# Altium PCB PWR_MOSFET_v2.PcbDoc
Units mm, origin at the board's own origin, x right, y up, seen from the top; angles counter-clockwise.
Board outline 90 x 91.65 mm, 2 copper layers (Top Layer, Bottom Layer); 105 components, 60 nets, 273 pads, 68 vias.
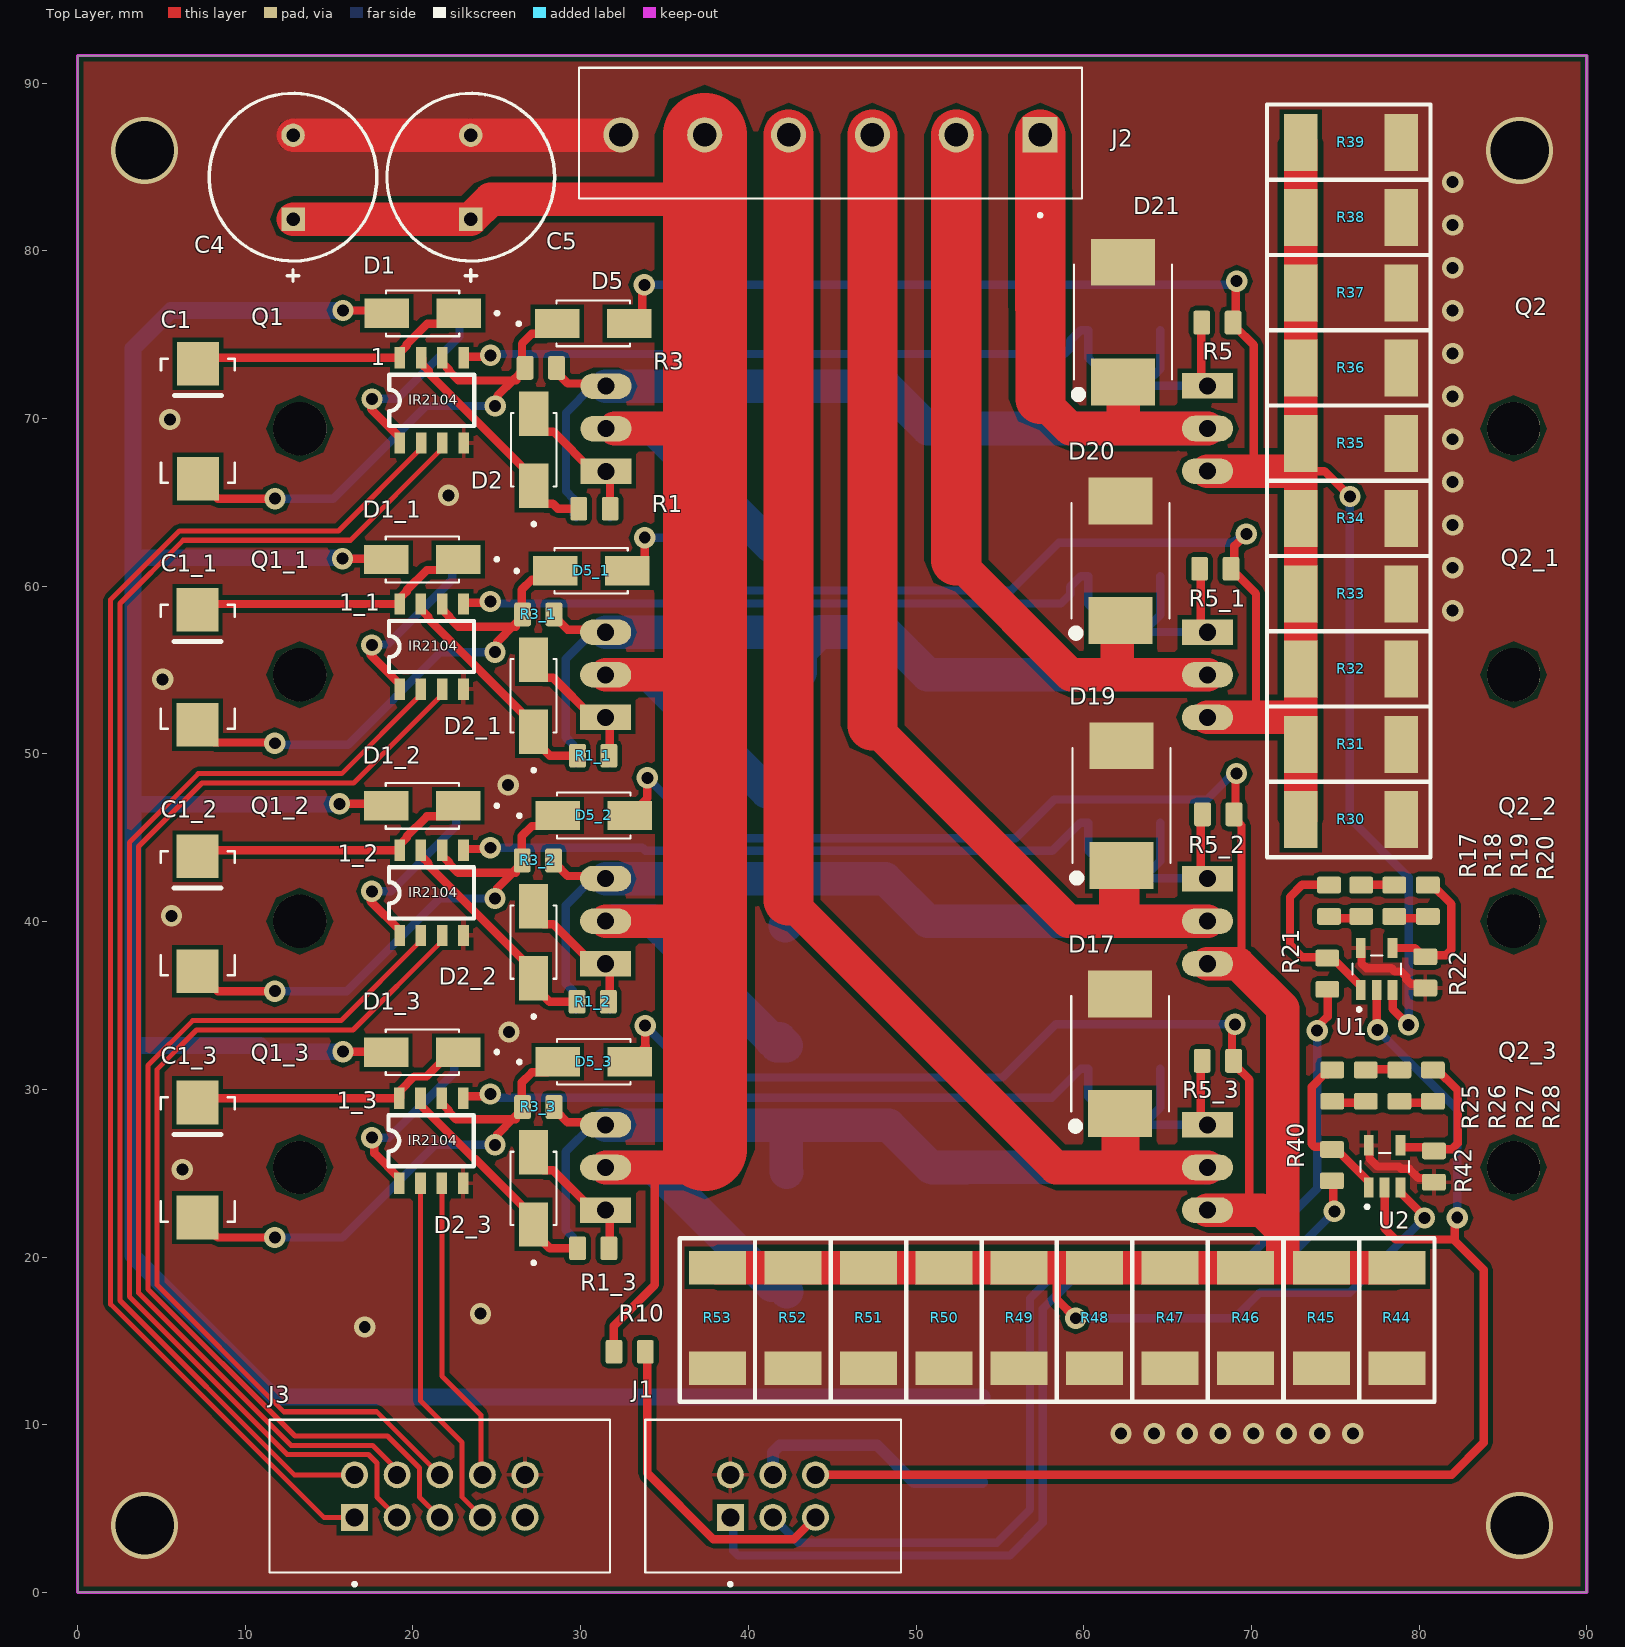
[diagram p0: Top Layer view]
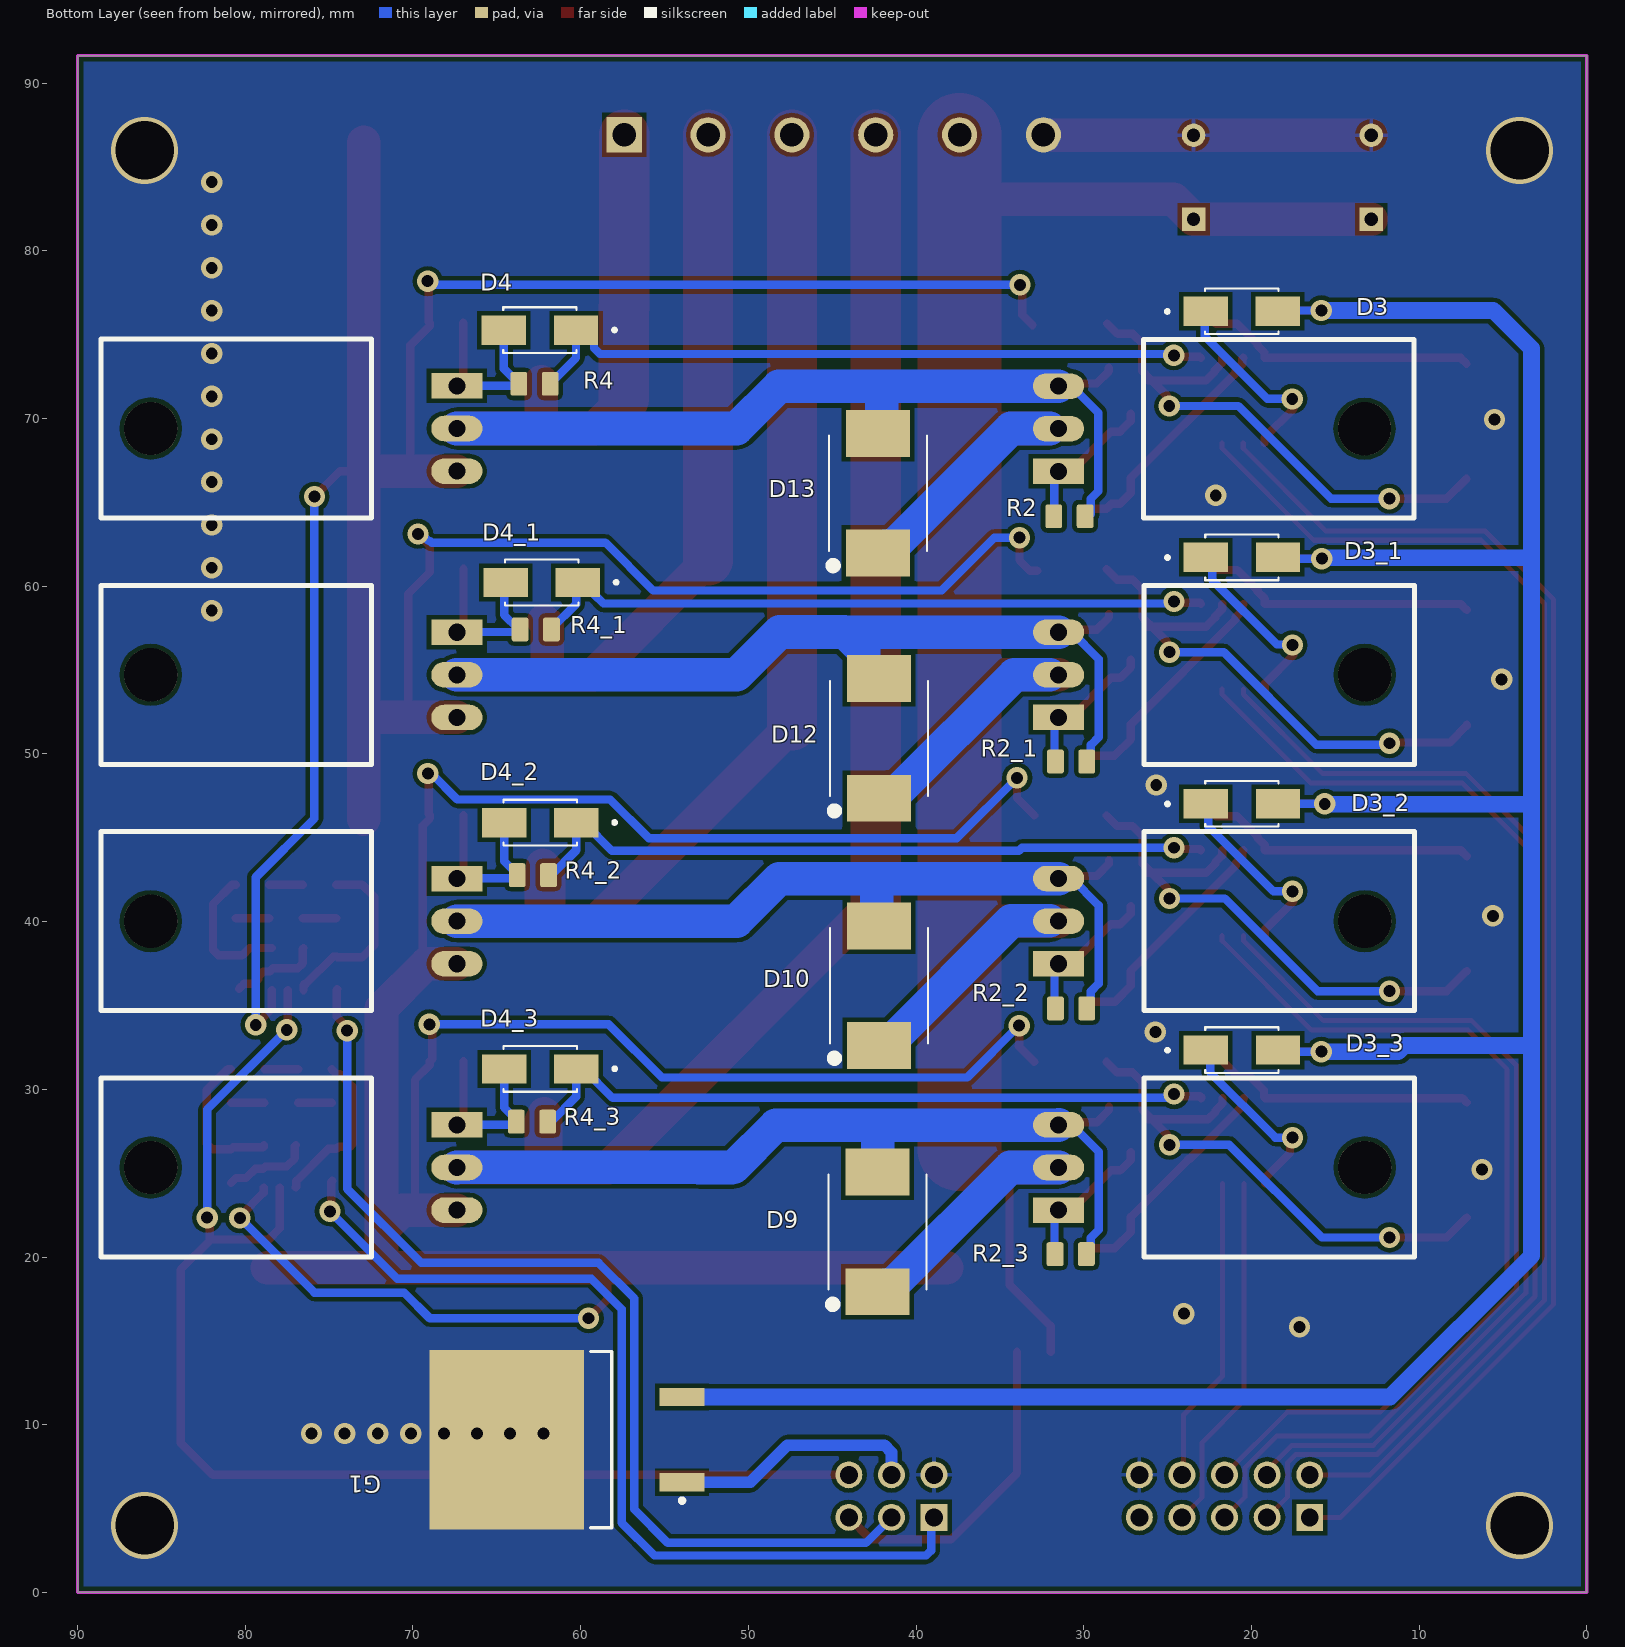
[diagram p1: Bottom Layer view, seen from below]
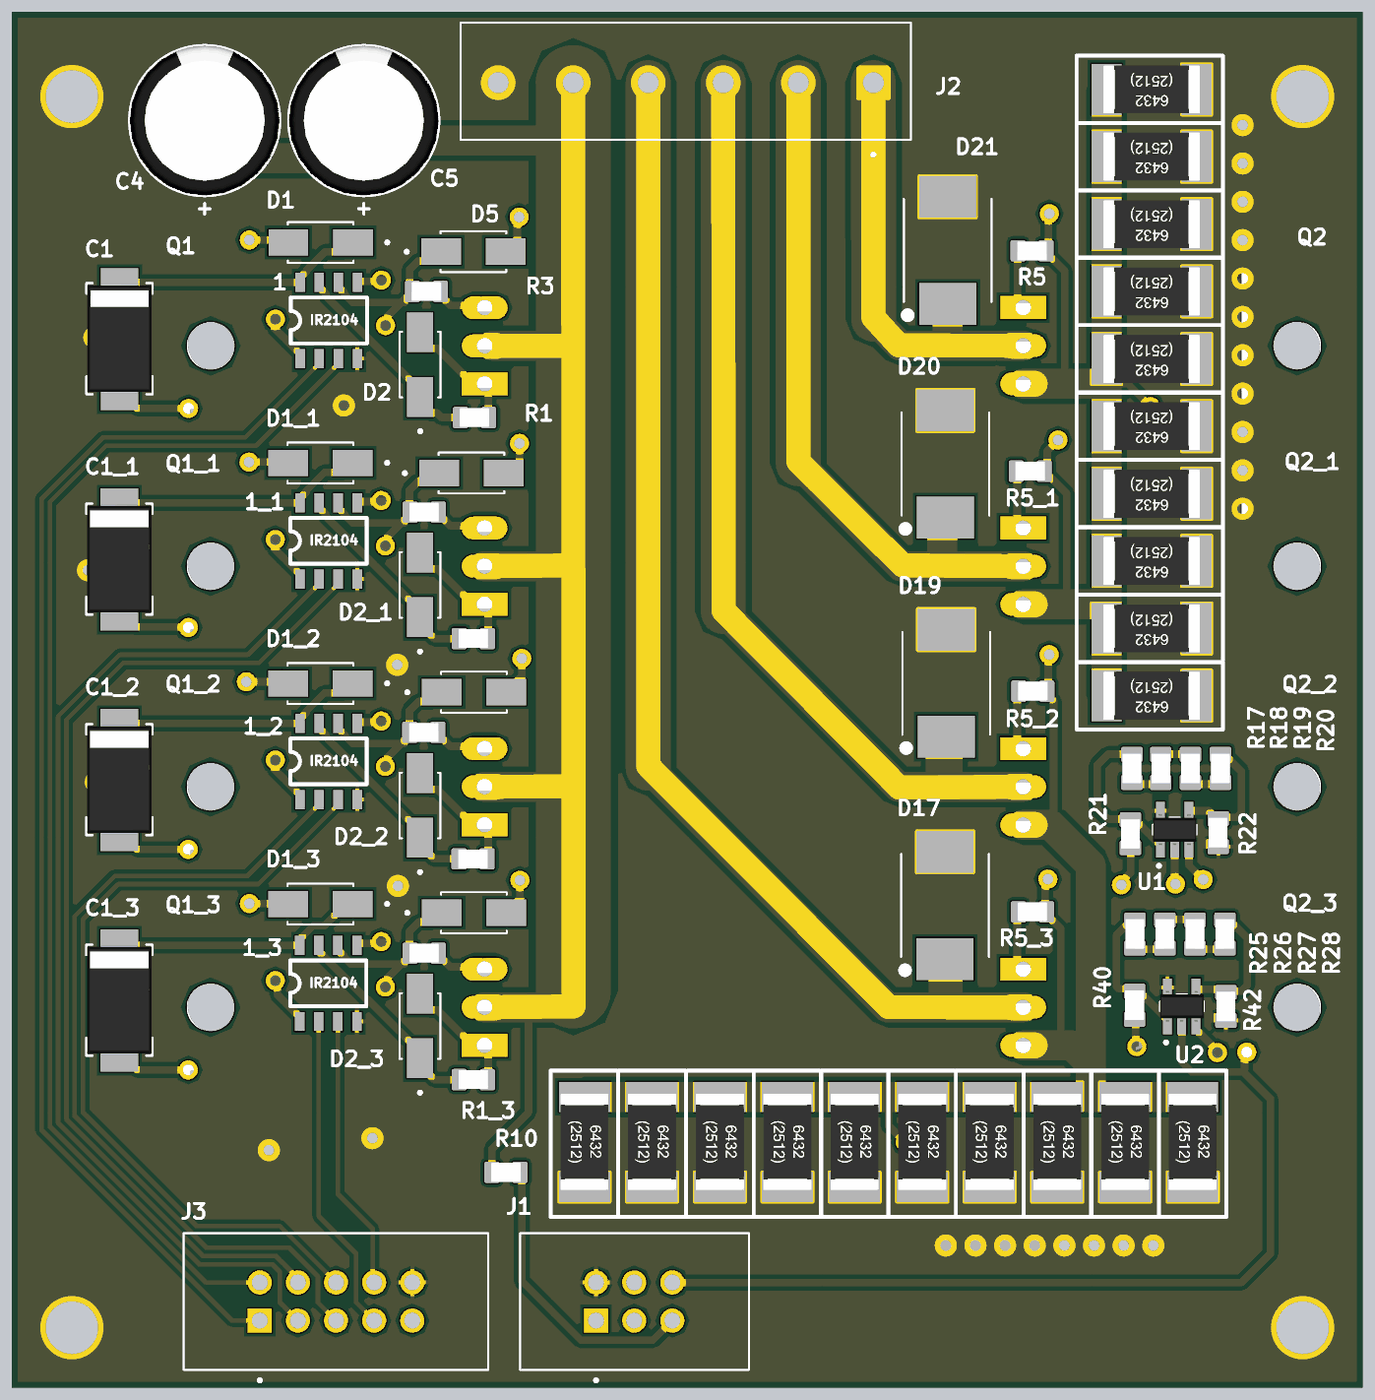
[diagram p2: 3D render of the assembled board from above, using the file's embedded part models]

## Layer stack, top to bottom
Top Solder: solder mask 0.0102, Solder Resist, Dk 3.5
Top Layer: signal copper 0.0356
Dielectric 1: dielectric 0.32, FR-4, Dk 4.8
Bottom Layer: signal copper 0.0356
Bottom Solder: solder mask 0.0102, Solder Resist, Dk 3.5

## Board outline
0,0 0,91.65 90,91.65 90,0

## Design rules (kind name [scope] priority, off if disabled: settings)
Clearance [All] p1: gap=0.254 ignorepadtopadclearanceinfootprint=FALSE except(0: Arc-Hole Track-Hole SMDPad-Hole THPad-Hole Via-Hole Fill-Hole Poly-Hole Region-Hole Text-Hole)
HoleSize [All] p1: absolutevalues=TRUE maxlimit=4 minlimit=0.025 maxpercent=80.000 minpercent=20.000
PolygonConnect [All] p1: connectstyle=Relief reliefconductorwidth=0.254 reliefentries=4 polygonreliefangle="90 Angle" airgapwidth=0.254
RoutingVias [All] p1: holewidth=0.711 width=1.27 viastyle="Through Hole" minholewidth=0 minwidth=0 maxholewidth=6 maxwidth=7
SolderMaskExpansion [All] p1: expansion=0.102 istentingtop=FALSE
Width [All] p1: maxlimit=6 minlimit=0.254 preferedwidth=0.254
29 further rules are at their usual default settings.

## Components (designator, comment, footprint, x,y, rotation, side; value= is the part's Value field where it differs from the comment)
1 "IR2104S" IR2104S 23.025,68.545 r90 top
1_1 "IR2104S" IR2104S 23.013,53.867 r90 top
1_2 "IR2104S" IR2104S 23.013,39.178 r90 top
1_3 "IR2104S" IR2104S 22.99,24.395 r90 top
C1 "{Value}" "C - EL_Tantal_TYPED" 7.175,69.875 r270 top
C1_1 "{Value}" "C - EL_Tantal_TYPED" 7.163,55.197 r270 top
C1_2 "{Value}" "C - EL_Tantal_TYPED" 7.163,40.508 r270 top
C1_3 "{Value}" "C - EL_Tantal_TYPED" 7.163,25.818 r270 top
C4 "220uF 50v" "ECR 10x13mm" 12.85,84.4 r90 top value=220uF
C5 "220uF 50v" "ECR 10x13mm" 23.45,84.4 r90 top value=220uF
D1 "ES1J" DIO_ES1J 20.575,76.275 r180 top
D1_1 "ES1J" DIO_ES1J 20.563,61.597 r180 top
D1_2 "ES1J" DIO_ES1J 20.563,46.908 r180 top
D1_3 "ES1J" DIO_ES1J 20.563,32.218 r180 top
D2 "ES1J" DIO_ES1J 27.2,68.15 r90 top
D2_1 "ES1J" DIO_ES1J 27.188,53.472 r90 top
D2_2 "ES1J" DIO_ES1J 27.188,38.783 r90 top
D2_3 "ES1J" DIO_ES1J 27.188,24.093 r90 top
D3 "ES1J" DIO_ES1J 20.575,76.4 r180 bottom
D3_1 "ES1J" DIO_ES1J 20.563,61.722 r180 bottom
D3_2 "ES1J" DIO_ES1J 20.563,47.033 r180 bottom
D3_3 "ES1J" DIO_ES1J 20.563,32.343 r180 bottom
D4 "ES1J" DIO_ES1J 62.425,75.275 r0 bottom
D4_1 "ES1J" DIO_ES1J 62.325,60.225 r0 bottom
D4_2 "ES1J" DIO_ES1J 62.413,45.908 r0 bottom
D4_3 "ES1J" DIO_ES1J 62.413,31.218 r0 bottom
D5 "ES1J" DIO_ES1J 30.75,75.675 r0 top
D5_1 "ES1J" DIO_ES1J 30.625,60.925 r0 top
D5_2 "ES1J" DIO_ES1J 30.788,46.333 r0 top
D5_3 "ES1J" DIO_ES1J 30.788,31.643 r0 top
D9 "MBRS540T3G" DIOM7958X213N 42.3,21.5 r90 bottom
D10 "MBRS540T3G" DIOM7958X213N 42.2,36.175 r90 bottom
D12 "MBRS540T3G" DIOM7958X213N 42.2,50.925 r90 bottom
D13 "MBRS540T3G" DIOM7958X213N 42.275,65.55 r90 bottom
D17 "MBRS540T3G" DIOM7958X213N 62.175,32.125 r90 top
D19 "MBRS540T3G" DIOM7958X213N 62.25,46.925 r90 top
D20 "MBRS540T3G" DIOM7958X213N 62.2,61.525 r90 top
D21 "MBRS540T3G" DIOM7958X213N 62.35,75.757 r90 top
G1 "L7812C - V" D2PAK_M 60.8,9.115 r0 bottom
J1 "DS1013-06SSIB1" CONNFLY_DS1013-06SSIB1 41.465,5.775 r0 top
J2 "TB003-500-P06BE" CUI_TB003-500-P06BE 57.4,86.925 r180 top
J3 "DS1013-10SSIB1" CONNFLY_DS1013-10SSIB1 21.6,5.745 r0 top
Q1 "IRF" TO-220-KCS0003B 31.506,69.398 r90 top locked
Q1_1 "IRF" TO-220-KCS0003B 31.494,54.72 r90 top locked
Q1_2 "IRF" TO-220-KCS0003B 31.494,40.031 r90 top locked
Q1_3 "IRF" TO-220-KCS0003B 31.494,25.341 r90 top locked
Q2 "IRF" TO-220-KCS0003B 67.384,69.41 r270 top
Q2_1 "IRF" TO-220-KCS0003B 67.384,54.72 r270 top
Q2_2 "IRF" TO-220-KCS0003B 67.384,40.031 r270 top locked
Q2_3 "IRF" TO-220-KCS0003B 67.384,25.341 r270 top locked
R1 "10R" RESC2012X65N 30.825,64.625 r0 top
R1_1 "10R" RESC2012X65N 30.75,49.9 r0 top
R1_2 "10R" RESC2012X65N 30.725,35.225 r0 top
R1_3 "10R" RESC2012X65N 30.75,20.525 r0 top
R2 "10K" RESC2012X65N 30.85,64.175 r180 bottom
R2_1 "10K" RESC2012X65N 30.75,49.55 r180 bottom
R2_2 "10K" RESC2012X65N 30.75,34.825 r180 bottom
R2_3 "10K" RESC2012X65N 30.775,20.175 r180 bottom
R3 "10R" RESC2012X65N 27.625,73.025 r0 top
R3_1 "10R" RESC2012X65N 27.475,58.325 r0 top
R3_2 "10R" RESC2012X65N 27.45,43.65 r0 top
R3_3 "10R" RESC2012X65N 27.475,28.95 r0 top
R4 "10R" RESC2012X65N 62.75,72.075 r0 bottom
R4_1 "10R" RESC2012X65N 62.675,57.425 r0 bottom
R4_2 "10R" RESC2012X65N 62.85,42.775 r0 bottom
R4_3 "10R" RESC2012X65N 62.9,28.075 r0 bottom
R5 "10K" RESC2012X65N 67.975,75.725 r0 top
R5_1 "10K" RESC2012X65N 67.85,61.05 r0 top
R5_2 "10K" RESC2012X65N 68.025,46.4 r0 top
R5_3 "10K" RESC2012X65N 68,31.7 r0 top
R10 "20K" RESC2012X65N 32.925,14.35 r0 top
R17 "10K" RESC2012X65N 74.625,41.25 r90 top
R18 "10K" RESC2012X65N 76.55,41.25 r270 top
R19 "10K" RESC2012X65N 78.525,41.25 r90 top
R20 "10K" RESC2012X65N 80.525,41.25 r270 top
R21 "10K" RESC2012X65N 74.525,36.9 r90 top
R22 "10K" RESC2012X65N 80.375,36.975 r90 top
R25 "10K" RESC2012X65N 74.825,30.225 r90 top
R26 "10K" RESC2012X65N 76.825,30.225 r270 top
R27 "10K" RESC2012X65N 78.825,30.225 r90 top
R28 "10K" RESC2012X65N 80.825,30.225 r270 top
R30 "1R" R2512 75.936,46.095 r180 top
R31 "1R" R2512 75.936,50.575 r180 top
R32 "1R" R2512 75.936,55.075 r180 top
R33 "1R" R2512 75.936,59.55 r180 top
R34 "1R" R2512 75.936,64.05 r180 top
R35 "1R" R2512 75.936,68.525 r180 top
R36 "1R" R2512 75.936,73.025 r180 top
R37 "1R" R2512 75.936,77.5 r180 top
R38 "1R" R2512 75.936,82 r180 top
R39 "1R" R2512 75.936,86.475 r180 top
R40 "10K" RESC2012X65N 74.805,25.483 r90 top
R42 "10K" RESC2012X65N 80.889,25.396 r90 top
R44 "1R" R2512 78.675,16.375 r270 top
R45 "1R" R2512 74.175,16.375 r270 top
R46 "1R" R2512 69.65,16.375 r270 top
R47 "1R" R2512 65.15,16.375 r270 top
R48 "1R" R2512 60.65,16.375 r270 top
R49 "1R" R2512 56.15,16.375 r270 top
R50 "1R" R2512 51.675,16.375 r270 top
R51 "1R" R2512 47.175,16.375 r270 top
R52 "1R" R2512 42.65,16.375 r270 top
R53 "1R" R2512 38.153,16.375 r270 top
U1 "LMC7101BIM5" *SOT95P280X145-5N 77.475,37.175 r90 top
U2 "LMC7101BIM5" *SOT95P280X145-5N 77.95,25.405 r90 top

## Footprints (in the part's own frame and the unit in brackets; to place one, negate y for a bottom-side part, rotate by r counter-clockwise, add the part's x,y. Pads: shape width x height; smd on the part's side, far side on the other; paste and mask are expansions set on the pad)
*SOT95P280X145-5N [mm]
  rect 1.21x0.59 smd mask+0.102: 1(-1.255,0.95) 2(-1.255,0) 3(-1.255,-0.95)
  rect 1.21x0.59 smd: 4(1.255,-0.95) 5(1.255,0.95)
  silkscreen extent -2.51,-1.45 0.8,1.45, body extent -1.18,-1.45 1.2,1.45, height 1.1
"C - EL_Tantal_TYPED" [mm] "танталовый конденсатор"
  rect 2.6x2.5 smd: 1(-3.4,0) 2(3.46,0)
  silkscreen extent -3.7,-2.2 3.7,2.2, body extent -3.65,-2.15 3.65,2.15, height 3.1
CONNFLY_DS1013-06SSIB1 [mm]
  rect 1.605x1.605 hole 1.07: 1(-2.54,-1.3)
  round 1.605 hole 1.07: 2(-2.54,1.24) 3(0,-1.3) 4(0,1.24) 5(2.54,-1.3) 6(2.54,1.24)
  silkscreen extent -7.61,-5.38 7.64,4.52
CONNFLY_DS1013-10SSIB1 [mm]
  rect 1.605x1.605 hole 1.07: 1(-5.08,-1.27)
  round 1.605 hole 1.07: 2(-5.08,1.27) 3(-2.54,-1.27) 4(-2.54,1.27) 5(0,-1.27) 6(0,1.27) 7(2.54,-1.27) 8(2.54,1.27) 9(5.08,-1.27) 10(5.08,1.27)
  silkscreen extent -10.15,-5.35 10.15,4.55
CUI_TB003-500-P06BE [mm]
  rect 2.1x2.1 hole 1.4: 1(0,0)
  round 2.1 hole 1.4: 2(5,0) 3(10,0) 4(15,0) 5(20,0) 6(25,0)
  silkscreen extent -2.5,-4 27.5,4.9
D2PAK_M [mm] "D2-PAK, 4-Leads, Body 8.8x10.4mm, Pitch 2.54mm, Lead Span 15.1mm, IPC Low Density"
  rect 2.7x1.1 smd: 1(-6.85,2.54) 3(-6.85,-2.54)
  rect 9.2x10.7 smd: 2(3.6,0)
  silkscreen extent -6.97,-5.25 -1.4,5.25, body extent -2.65,-5.28 6.35,5.28, height 4.69
DIO_ES1J [mm]
  rect 2.65x1.75 smd: A(2.15,0) K(-2.15,0)
  silkscreen extent -4.54,-1.36 2.19,1.36
DIOM7958X213N [mil]
  rect 110x150 smd: A(140.49,0) C(-140.49,0)
  silkscreen extent -176,-115 135,115
"ECR 10x13mm" [mm] "Rad Capacitor 50В-220мкФ"
  rect 1.4x1.4 hole 0.8 mask+0.06: 1(-2.5,0)
  round 1.4 hole 0.8 mask+0.06: 2(2.5,0)
  silkscreen extent -6.22,-5 5,5, body extent -5,-5 4.97,5, height 12.51
IR2104S [mm]
  rect 1.27x0.635 smd: 1(0,3.81) 2(0,2.54) 3(0,1.27) 4(0,0) 5(5.08,0) 6(5.08,1.27) 7(5.08,2.54) 8(5.08,3.81)
  silkscreen extent 1.02,-0.63 4.06,4.44
R2512 [mm]
  rect 2x3.4 smd: 1(-3,0) 2(3,0)
  silkscreen extent -4.75,-2.25 5,2.25, body extent -3.2,-1.6 3.2,1.6, height 0.6
RESC2012X65N [mm]
  rrect25% 1x1.42 smd: 1(-0.935,0) 2(0.935,0)
  body extent -1,-0.63 1,0.63, height 0.6
TO-220-KCS0003B [mil]
  rect 60x120 hole 40: 1(-100,0)
  oval 60x120 hole 40: 2(0,0) 3(100,0)
  round 125 hole 125 unplated: ""(0,718.5)
  body extent -190,-97 200,827

## Part data
1 1_1 1_2 1_3: "Half-Bridge Gate Driver IC Non-Inverting 8-SOIC", Package="SO-8 Infineon", Availability=Unavailable, MF="Infineon Technologies", MP=IR2104S, Price=None, SnapEDA_Link=https://www.snapeda.com/parts/IR2104S/Infineon%20Technologies/view-part/582439/?ref=snap
C1 C1_1 C1_2 C1_3: library part "C - EL_Tantal_SMD_TypeD", "Конденсатор электролитический танталовый TypeD", Indication={Indication}, Name="22uf 35V"
C4 C5: library part "Cap Pol", "Polarized Capacitor (Rad)", Voltage=50, Type=Type, URL=http://www.hitano.com.tw/PDF/ECR_081225.pdf
D1 D1_1 D1_2 D1_3 D2 D2_1 D2_2 D2_3 D3 D3_1 D3_2 D3_3 D4 D4_1 D4_2 D4_3 D5 D5_1 D5_2 D5_3: "Diode Standard 600V 1A Surface Mount SMA (DO-214AC)", Package="SMA-2 ON Semiconductor", Arrow_Electronics-Purchase-URL=https://snapeda.com/shop?store=Arrow+Electronics&id=1637442, Availability=Good, BuyPart=https://www.snapeda.com/parts/ES1J/ON%20Semiconductor/view-part/1637442/?ref=eda, DigiKey-Purchase-URL=https://snapeda.com/shop?store=DigiKey&id=1637442, MF="ON Semiconductor", Mouser-Purchase-URL=https://snapeda.com/shop?store=Mouser&id=1637442, MP=ES1J, Price=None, SnapEDA_Link=https://www.snapeda.com/parts/ES1J/ON%20Semiconductor/view-part/1637442/?ref=snap
D9 D10 D12 D13 D17 D19 D20 D21: "Diode Schottky 40V 5A Surface Mount SMC", Package="DO-214 ON Semiconductor", Availability=Unavailable, MF="ON Semiconductor", MP=MBRS540T3G, Price=None, SnapEDA_Link=https://www.snapeda.com/parts/MBRS540T3G/ON%20Semiconductor/view-part/78777/?ref=snap
G1: library part "G - L7812", "Линейный стабилизатор 12В 0,5А", Indication={Indication}, Name=L7812
J1: "Socket; IDC; male; PIN: 6; straight; THT; gold plated; 2.54mm"
J2: "2~24 Poles, Screw Type, Horizontal, 5.0 Pitch, 26~14 _AWG_, Terminal Block Connector", Package=None, Availability=Unavailable, MF="CUI Devices", MP=TB003-500-P06BE, Price=None, SnapEDA_Link=https://www.snapeda.com/parts/TB003-500-P06BE/CUI%20Devices/view-part/3590657/?ref=snap
J3: "Socket; IDC; male; PIN: 10; straight; THT; gold plated; 2.54mm", Package=None, Availability=Unavailable, BuyPart=https://www.snapeda.com/parts/DS1013-10SSIB1/Connfly/view-part/951223/?ref=eda, MF=Connfly, MP=DS1013-10SSIB1, Price=None, SnapEDA_Link=https://www.snapeda.com/parts/DS1013-10SSIB1/Connfly/view-part/951223/?ref=snap
Q1 Q1_1 Q1_2 Q1_3 Q2 Q2_1 Q2_2 Q2_3: "N-Channel Power Transistor - TO-220", Package=None, Availability=Unavailable, MP=IPP037N06L3_G, Price=None
R1 R1_1 R1_2 R1_3 R2 R2_1 R2_2 R2_3 R3 R3_1 R3_2 R3_3 R4 R4_1 R4_2 R4_3 R5 R5_1 R5_2 R5_3 R10: library part Resistor
R17 R18 R19 R20 R21 R22 R25 R26 R27 R28 R40 R42: library part 8-1879343-8, "Res Thin Film 0805 10K Ohm 1% 0.1W(1/10W) Â±50ppm/C Epoxy Pad SMD T/R", Package=0805, Power_Rating=".1 W", Tolerance=1%, Voltage_Rating="100 V", Availability=Warning, Check_prices=https://www.snapeda.com/parts/8-1879343-8/TE%20Connectivity/view-part/2208734/?ref=eda, EU_RoHS_Compliance=Compliant, MF="TE Connectivity", MP=8-1879343-8, Price=None, Resistance=10K, SnapEDA_Link=https://www.snapeda.com/parts/8-1879343-8/TE%20Connectivity/view-part/2208734/?ref=snap
R30 R31 R32 R33 R34 R35 R36 R37 R38 R39 R44 R45 R46 R47 R48 R49 R50 R51 R52 R53: library part "Resistor - 1%", "Resistor - 1%"
U1 U2: Check_prices=https://www.snapeda.com/parts/LMC7101BIM5/Texas%20Instruments/view-part/19255/?ref=eda, SnapEDA_Link=https://www.snapeda.com/parts/LMC7101BIM5/Texas%20Instruments/view-part/19255/?ref=snap

## Via types
v1: diameter 1.27, hole 0.711, Top Layer to Bottom Layer, 64 vias
v2: diameter 4, hole 3.5, Top Layer to Bottom Layer, 4 vias

## Nets (pads, with @x,y where several pads share a name; then routed paths per layer and width w, separated by ;. In a path a pad name is that pad's centre, name@x,y a point inside that pad or via, vN(x,y) a via of type N, cw(c..) or ccw(c..) an arc to the next point about the centre after c; other vN are vias at no path point)
12v: D1.A D1_1.A D1_2.A D1_3.A D3.A D3_1.A D3_2.A D3_3.A G1.3 | length 180.8
  Top Layer w0.5: v1(15.625,47.025) 18.296,47.025 D1_2.A ; v1(15.8,61.65) 18.266,61.65 18.313,61.697 D1_1.A ; v1(15.825,32.25) 18.245,32.25 18.313,32.318 D1_3.A ; v1(15.825,76.45) 18.25,76.45 D1.A
  Bottom Layer w0.5: v1(15.625,47.025) 18.371,47.025 18.388,47.008 D3_2.A ; v1(15.8,61.65) 18.341,61.65 D3_1.A ; v1(15.825,32.25) 18.32,32.25 D3_3.A ; v1(15.825,76.45) 18.325,76.45 18.4,76.375 D3.A
  Bottom Layer w1: v1(15.625,47.025) 15.6,47 3.3,47 ; v1(15.8,61.65) 15.75,61.7 3.3,61.7 ; v1(15.825,32.25) 11.24,32.25 10.879,32.611 3.3,32.611 ; v1(15.825,76.45) 5.575,76.45 3.3,74.175 3.3,61.7 ; G1.3 11.72,11.655 3.3,20.075 3.3,32.611 ; 3.3,32.611 3.3,47 ; 3.3,47 3.3,61.7
A: 1.2 J3.1 | length 84.4
  Top Layer w0.3: J3.1 14.683,4.475 1.975,17.183 1.975,57.325 1.975,58.083 1.975,59.208 6.067,63.3 7.192,63.3 7.95,63.3 15.557,63.3 20.485,68.228 1.2
A3.3v: J1.6 U1.2 U2.2 | length 77.3
  Top Layer w0.5: J1.6 81.94,7.015 83.85,8.925 83.85,19.25 82.05,21.05 ; U1.2 77.475,33.6 v1(77.525,33.55) ; U2.2 77.95,21.7 78.6,21.05 82.05,21.05 ; v1(82.275,22.35) 82.128,22.203 82.128,21.128 82.05,21.05
  Bottom Layer w0.5: v1(77.525,33.55) 82.275,28.8 v1(82.275,22.35)
AGND: 1.4 1_1.4 1_2.4 1_3.4 C4.2 C5.2 D17.A D19.A D20.A D21.A G1.2 J1.2 J2.6 J3.10 R22.1 R30.1 R31.1 R32.1 R33.1 R34.1 R35.1 R36.1 R37.1 R38.1 R39.1 R42.1 R44.2 R45.2 R46.2 R47.2 R48.2 R49.2 R50.2 R51.2 R52.2 R53.2 U1.5 U2.5 | length 30.2
  Top Layer w0.5: U1.5 76.57,38.385 76.57,37.518 76.863,37.225 78.346,37.225 78.542,37.029 78.929,37.029 79.224,36.734 79.224,36.583 79.517,36.29 80.085,36.29 R22.1@80.375,36 ; U2.5 77.045,26.615 77.045,25.883 77.528,25.4 78.8,25.4 78.941,25.259 79.404,25.259 79.952,24.711 80.564,24.711 R42.1@80.85,24.425
  Top Layer w2: C4.2 C5.2 32.375,86.9 J2.6
  other v1: 62.225,9.475 64.2,9.475 66.175,9.475 68.15,9.475 70.125,9.475 72.1,9.475 74.075,9.475 76.05,9.475 17.125,15.825 24.025,16.625 6.25,25.225 25.725,33.425 5.6,40.35 25.675,48.15 5.075,54.45 82,58.55 82,61.105 82,63.66 22.125,65.425 82,66.215 82,68.77 5.5,69.95 82,71.325 82,73.88 82,76.435 82,78.99 82,81.545 82,84.1
  other v2: 4,4 86,4 4,86 86,86
B: 1_1.2 J3.3 | length 71.1
  Top Layer w0.3: J3.3 17.853,5.681 17.853,7.722 17.354,8.221 12.503,8.221 3.083,17.642 3.083,44.716 7.192,48.825 15.748,48.825 20.473,53.55 1_1.2
C: 1_2.2 J3.5 | length 57.1
  Top Layer w0.3: 1_2.2 20.473,38.86 15.713,34.1 6.867,34.1 4.191,31.424 4.191,18.101 12.962,9.329 18.479,9.329 20.393,7.415 20.393,5.681 J3.5
D: 1_3.2 J3.7 | length 21.4
  Top Layer w0.3: 1_3.2 20.45,11.425 22.933,8.942 22.933,5.681 J3.7
EN_B: 1_1.3 J3.4 | length 68.9
  Top Layer w0.3: J3.4 19.06,7.298 17.583,8.775 12.733,8.775 3.637,17.871 3.637,44.487 7.421,48.271 16.464,48.271 21.743,53.55 1_1.3
EN_D: 1_3.3 J3.8 | length 18.4
  Top Layer w0.3: 1_3.3 21.72,12.905 24.05,10.575 24.05,7.105 J3.8
INH1(EN_A): 1.3 J3.2 | length 83.2
  Top Layer w0.3: J3.2 12.926,7.015 2.529,17.412 2.529,58.979 6.296,62.746 16.273,62.746 21.755,68.228 1.3
INH2(EN_C): 1_2.3 J3.6 | length 54.9
  Top Layer w0.3: J3.6 17.84,10.775 12.3,10.775 4.745,18.33 4.745,31.195 7.096,33.546 16.429,33.546 21.743,38.86 1_2.3
Net1_1: 1.1 D3.K | length 11.6
  Top Layer w0.5: v1(17.564,71.175) 17.564,71.094 17.497,71.028 17.497,70.58 19.215,68.863 1.1
  Bottom Layer w0.5: v1(17.564,71.175) 19.05,71.175 22.775,74.9 22.775,76.35 D3.K
Net1_1_1: 1_1.1 D3_1.K | length 11.3
  Top Layer w0.5: v1(17.552,56.497) 17.552,56.417 17.485,56.35 17.485,55.903 19.203,54.185 1_1.1
  Bottom Layer w0.5: v1(17.552,56.497) 17.584,56.529 18.479,56.529 22.34,60.39 22.34,61.35 D3_1.K
Net1_1_5: 1_1.5 D4_1.K R4_1.1 | length 42.2
  Top Layer w0.5: 1_1.5 23.013,58.955 23.08,59.022 24.538,59.022 v1(24.613,59.097)
  Bottom Layer w0.5: v1(24.613,59.097) 24.739,58.971 58.637,58.971 59.188,59.522 59.188,59.972 59.813,60.597 60.263,60.597 60.263,58.947 61.738,57.472 R4_1.1@61.738,57.272
Net1_1_6: 1_1.6 C1_1.2 D5_1.K R3_1.1 | length 33
  Top Layer w0.5: C1_1.2 7.163,51.687 8.163,50.687 11.715,50.687 v1(11.763,50.639) ; 1_1.6 21.743,58.63 22.164,58.209 22.164,58.131 22.698,57.597 26.138,57.597 ; v1(24.888,56.072) 25.035,56.22 25.035,56.695 26.038,57.697 R3_1.1@26.488,58.147 ; R3_1.1@26.488,58.347 R3_1.1@26.488,58.147 ; D5_1.K@28.638,61.022 28.013,60.397 27.088,60.397 26.488,59.797 R3_1.1@26.488,58.147
  Bottom Layer w0.5: v1(11.763,50.639) 11.855,50.547 16.122,50.547 21.647,56.072 v1(24.888,56.072)
Net1_1_7: 1_1.7 D2_1.K R1_1.1 | length 13.9
  Top Layer w0.5: 1_1.7 20.54,58.88 20.54,58.562 20.921,58.181 20.921,58.039 27.188,51.772 27.188,50.872 28.16,49.9 R1_1.1
Net1_1_8: 1_1.8 C1_1.1 D1_1.K | length 17
  Top Layer w0.5: C1_1.1 7.513,58.947 1_1.8 19.203,59.265 19.624,59.686 19.624,59.764 20.833,60.972 22.088,60.972 D1_1.K
Net1_2_1: 1_2.1 D3_2.K | length 11.4
  Top Layer w0.5: v1(17.552,41.808) 17.552,41.727 17.485,41.66 17.485,41.213 19.203,39.495 1_2.1
  Bottom Layer w0.5: v1(17.552,41.808) 18.683,41.808 22.576,45.701 22.576,46.895 D3_2.K
Net1_2_5: 1_2.5 D4_2.K R4_2.1 | length 42
  Top Layer w0.5: 1_2.5 23.013,44.265 23.08,44.333 24.538,44.333 v1(24.613,44.408)
  Bottom Layer w0.5: v1(24.613,44.408) 33.682,44.408 33.869,44.221 58.126,44.221 59.813,45.908 D4_2.K 60.263,44.258 61.738,42.783 R4_2.1@61.738,42.583
Net1_2_6: 1_2.6 C1_2.2 D5_2.K R3_2.1 | length 32.9
  Top Layer w0.5: C1_2.2 8.353,35.858 v1(11.763,35.858) ; 1_2.6 21.743,43.94 22.164,43.519 22.164,43.441 22.698,42.908 26.138,42.908 ; v1(24.888,41.383) 25.035,41.53 25.035,42.005 26.038,43.008 R3_2.1@26.488,43.458 ; R3_2.1@26.488,43.658 R3_2.1@26.488,43.458 ; D5_2.K 28.013,45.708 27.088,45.708 26.488,45.108 R3_2.1@26.488,43.458
  Bottom Layer w0.5: v1(11.763,35.858) 16.058,35.858 21.583,41.383 v1(24.888,41.383)
Net1_2_7: 1_2.7 D2_2.K R1_2.1 | length 13.9
  Top Layer w0.5: 1_2.7 20.54,44.19 20.54,43.873 20.921,43.492 20.921,43.349 27.188,37.083 27.188,36.183 28.146,35.225 R1_2.1
Net1_2_8: 1_2.8 C1_2.1 D1_2.K | length 17
  Top Layer w0.5: C1_2.1 7.513,44.258 1_2.8 19.203,44.575 19.624,44.996 19.624,45.074 20.833,46.283 22.088,46.283 D1_2.K
Net1_3_1: 1_3.1 D3_3.K | length 11.4
  Top Layer w0.5: v1(17.552,27.118) 17.699,26.971 17.699,26.193 19.18,24.713 1_3.1
  Bottom Layer w0.5: v1(17.552,27.118) 18.568,27.118 22.461,31.011 22.461,32.091 D3_3.K
Net1_3_5: 1_3.5 D4_3.K R4_3.1 | length 42.1
  Top Layer w0.5: 1_3.5 22.99,29.529 23.058,29.597 24.491,29.597 v1(24.613,29.718)
  Bottom Layer w0.5: v1(24.613,29.718) 24.821,29.718 25.043,29.496 58.091,29.496 59.813,31.218 D4_3.K 60.263,29.568 61.738,28.093 R4_3.1@61.738,27.893
Net1_3_6: 1_3.6 C1_3.2 D5_3.K R3_3.1 | length 32.9
  Top Layer w0.5: C1_3.2 8.353,21.168 v1(11.763,21.168) ; 1_3.6 21.72,29.158 22.141,28.736 22.141,28.659 22.582,28.218 26.138,28.218 ; v1(24.888,26.693) 25.035,26.84 25.035,27.315 26.038,28.318 R3_3.1@26.488,28.768 ; R3_3.1@26.488,28.968 R3_3.1@26.488,28.768 ; D5_3.K 28.013,31.018 27.088,31.018 26.488,30.418 R3_3.1@26.488,28.768
  Bottom Layer w0.5: v1(11.763,21.168) 15.793,21.168 21.318,26.693 v1(24.888,26.693)
Net1_3_7: 1_3.7 D2_3.K R1_3.1 | length 13.8
  Top Layer w0.5: 1_3.7 20.518,29.408 20.518,29.012 23.705,25.825 23.756,25.825 27.188,22.393 27.188,21.493 28.156,20.525 R1_3.1
Net1_3_8: 1_3.8 C1_3.1 D1_3.K | length 17
  Top Layer w0.5: C1_3.1 7.42,29.475 1_3.8 19.248,29.543 19.248,29.938 20.075,30.765 20.81,30.765 22.263,32.218 D1_3.K
Net1_5: 1.5 D4.K R4.1 | length 42.1
  Top Layer w0.5: 1.5 23.025,73.632 23.092,73.7 24.55,73.7 v1(24.625,73.775)
  Bottom Layer w0.5: v1(24.625,73.775) 24.7,73.85 58.85,73.85 59.2,74.2 59.2,74.65 59.825,75.275 D4.K 60.275,73.625 61.75,72.15 R4.1@61.75,71.95
Net1_6: 1.6 C1.2 D5.K R3.1 | length 32.9
  Top Layer w0.5: C1.2 8.365,65.225 v1(11.775,65.225) ; 1.6 21.755,73.308 22.176,72.886 22.176,72.809 22.71,72.275 26.15,72.275 ; v1(24.9,70.75) 25.047,70.897 25.047,71.372 26.05,72.375 R3.1@26.5,72.825 ; R3.1@26.5,73.025 R3.1@26.5,72.825 ; D5.K 27.975,75.05 27.075,75.05 26.5,74.475 R3.1@26.5,72.825
  Bottom Layer w0.5: v1(11.775,65.225) 15.25,65.225 20.775,70.75 v1(24.9,70.75)
Net1_7: 1.7 D2.K R1.1 | length 13.9
  Top Layer w0.5: 1.7 20.552,73.558 20.552,73.24 20.933,72.859 20.933,72.717 27.2,66.45 27.2,65.55 27.825,64.925 28.34,64.925 28.64,64.625 R1.1
Net1_8: 1.8 C1.1 D1.K | length 17
  Top Layer w0.5: C1.1 7.525,73.625 1.8 19.215,73.943 19.636,74.364 19.636,74.441 20.845,75.65 22.1,75.65 D1.K
NetD2_1_A: D2_1.A Q1_1.1 R1_1.2 R2_1.1 | length 11.2
  Top Layer w0.5: D2_1.A 27.188,55.172 27.813,54.547 28.365,54.547 30.732,52.18 Q1_1.1 31.738,51.936 R1_1.2@31.738,49.897
  Bottom Layer w0.5: Q1_1.1 31.738,51.936 R2_1.1@31.738,49.447
NetD2_2_A: D2_2.A Q1_2.1 R1_2.2 R2_2.1 | length 11.2
  Top Layer w0.5: D2_2.A 27.188,40.483 27.813,39.858 28.365,39.858 30.732,37.491 Q1_2.1 31.738,37.247 R1_2.2@31.738,35.208
  Bottom Layer w0.5: Q1_2.1 31.738,37.247 R2_2.1@31.738,34.758
NetD2_3_A: D2_3.A Q1_3.1 R1_3.2 R2_3.1 | length 11.2
  Top Layer w0.5: D2_3.A 27.188,25.793 27.813,25.168 28.365,25.168 30.732,22.801 Q1_3.1 31.738,22.557 R1_3.2@31.738,20.518
  Bottom Layer w0.5: Q1_3.1 31.738,22.557 R2_3.1@31.738,20.068
NetD2_A: D2.A Q1.1 R1.2 R2.1 | length 11.2
  Top Layer w0.5: D2.A 27.2,69.85 27.825,69.225 28.377,69.225 30.744,66.858 Q1.1 31.75,66.614 R1.2@31.75,64.575
  Bottom Layer w0.5: Q1.1 31.75,66.614 R2.1@31.75,64.125
NetD4_1_A: D4_1.A Q2_1.1 R4_1.2 R5_1.1 | length 11.2
  Top Layer w0.5: R5_1.1@66.988,61.047 66.988,57.656 Q2_1.1@67.372,57.272
  Bottom Layer w0.5: D4_1.A@64.563,60.597 64.563,58.297 63.738,57.472 63.738,57.272 Q2_1.1@67.372,57.272
NetD4_2_A: D4_2.A Q2_2.1 R4_2.2 R5_2.1 | length 11.2
  Top Layer w0.5: R5_2.1@66.988,46.358 66.988,42.967 Q2_2.1@67.372,42.583
  Bottom Layer w0.5: D4_2.A 64.563,43.608 63.738,42.783 63.738,42.583 Q2_2.1@67.372,42.583
NetD4_3_A: D4_3.A Q2_3.1 R4_3.2 R5_3.1 | length 11.2
  Top Layer w0.5: R5_3.1@66.988,31.668 66.988,28.277 Q2_3.1@67.372,27.893
  Bottom Layer w0.5: D4_3.A 64.563,28.918 63.738,28.093 63.738,27.893 Q2_3.1@67.372,27.893
NetD4_A: D4.A Q2.1 R4.2 R5.1 | length 11.2
  Top Layer w0.5: R5.1@67,75.725 67,72.334 Q2.1
  Bottom Layer w0.5: D4.A 64.575,72.975 63.75,72.15 63.75,71.95 Q2.1
NetD5_1_A: D5.A D5_1.A Q2.3 Q2_1.3 R5.2 R5_1.2 R30.2 R31.2 R32.2 R33.2 R34.2 R35.2 R36.2 R37.2 R38.2 R39.2 U1.3 | length 193.7
  Top Layer w0.5: D5_1.A 33.2,60.925 33.825,61.55 v1(33.825,62.9) ; D5.A@33.05,75.575 33.675,76.2 33.675,77.85 v1(33.8,77.975) ; v1(69.125,78.2) 69.063,78.138 69.063,75.787 69,75.725 69,75.525 70.15,74.375 70.15,66.945 70.075,66.87 ; v1(69.7,63.125) 68.988,62.413 68.988,61.047 68.988,60.847 70.275,59.56 70.275,52.475 69.98,52.18 ; R35.2@72.766,66.87 72.936,66.87 74.355,66.87 v1(75.875,65.35) ; U1.3 78.425,34.8 v1(79.375,33.85)
  Top Layer w2: Q2_1.3 69.98,52.18 72.716,52.18 72.936,52.4 ; Q2.3 70.075,66.87 R35.2@72.766,66.87 ; R30.2 R31.2 72.936,52.4 ; R39.2 R38.2 R37.2 R36.2 R35.2 72.936,66.87 R34.2 R33.2 R32.2 72.936,52.4
  Bottom Layer w0.5: v1(33.8,77.975) 68.9,77.975 v1(69.125,78.2) ; v1(33.825,62.9) 35.325,62.9 38.475,59.75 55.675,59.75 58.525,62.6 68.875,62.6 68.975,62.7 69.067,62.7 69.492,63.125 v1(69.7,63.125) ; v1(75.875,65.35) 75.875,46.15 79.375,42.65 v1(79.375,33.85)
NetD5_2_A: D5_2.A D5_3.A Q2_2.3 Q2_3.3 R5_2.2 R5_3.2 R44.1 R45.1 R46.1 R47.1 R48.1 R49.1 R50.1 R51.1 R52.1 R53.1 U2.3 | length 200.2
  Top Layer w0.5: D5_3.A 33.888,32.593 33.85,32.631 v1(33.85,33.8) ; D5_2.A 33.975,47.37 v1(33.975,48.575) ; 58.4,19.375 58.4,17.475 v1(59.525,16.35) ; v1(69.025,33.875) 68.841,33.691 68.841,31.815 68.988,31.668 68.988,31.468 69.875,30.581 69.875,23.55 70.625,22.8 ; v1(69.113,48.833) 69.05,48.77 69.05,46.42 68.988,46.358 68.988,46.158 69.412,45.733 69.412,37.55 ; U2.3 78.9,23.84 80.325,22.415 v1(80.325,22.325)
  Top Layer w2: R53.1 R52.1 R51.1 R50.1 R49.1 58.4,19.375 R48.1 R47.1 R46.1 71.8,19.375 ; Q2_3.3 Q2_3.3 70.625,22.8 71.8,21.625 ; Q2_2.3 69.209,37.491 71.875,34.825 71.875,19.375 R45.1 R44.1
  Bottom Layer w0.5: v1(33.85,33.8) 36.945,30.706 55.156,30.706 58.325,33.875 v1(69.025,33.875) ; v1(33.975,48.575) 37.575,44.975 55.93,44.975 58.242,47.287 67.359,47.287 68.905,48.833 v1(69.113,48.833) ; v1(59.525,16.35) 69,16.35 70.525,17.875 75.875,17.875 v1(80.325,22.325)
NetD9_A: D9.A D17.C J2.4 Q1_3.3 Q2_3.2 R2_3.2 R3_3.2 | length 166.7
  Top Layer w0.5: R3_3.2@28.488,28.968 28.488,28.768 29.22,28.036 31.339,28.036 Q1_3.3
  Top Layer w2: 42.4,41.275 58.334,25.341 62.075,25.341 ; D17.C 62.075,28.457 62.075,25.341 ; 62.338,25.353 D17.C@62.338,28.131 ; Q2_3.2 62.075,25.341
  Top Layer w3: 42.4,41.275 J2.4
  Bottom Layer w0.5: R2_3.2@29.738,20.068 29.57,20.236 29.57,21.161 29.113,21.618 29.113,26.286 30.708,27.881 Q1_3.3
  Bottom Layer w2: 42.275,27.857 42.275,25.093 D9.A ; 42.275,27.869 48.169,27.869 42.038,27.869 ; 48.368,27.857 50.88,25.345 ; 50.975,25.341 52.959,25.341 ; Q2_3.2 Q2_3.2@67.372,25.353 ; Q1_3.3@31.506,27.869 42.038,27.869 ; Q1_3.3@31.506,27.869 42.038,27.869 ; Q1_3.3@31.506,27.869 Q1_3.3 Q1_3.3@31.506,27.869 ; Q2_3.2@67.372,25.353 52.959,25.353 Q2_3.2@67.372,25.353
NetD10_A: D10.A D19.C J2.3 Q1_2.3 Q2_2.2 R2_2.2 R3_2.2 | length 119.5
  Top Layer w0.5: R3_2.2@28.488,43.658 28.488,43.458 29.22,42.726 31.339,42.726 Q1_2.3
  Top Layer w2: 47.4,51.702 59.072,40.031 61.9,40.031 ; D19.C 61.9,43.007 61.9,40.031 ; 62.338,40.043 D19.C@62.338,42.821 ; Q2_2.2 61.9,40.031
  Top Layer w3: 47.4,51.702 J2.3
  Bottom Layer w0.5: R2_2.2@29.738,34.758 29.57,34.925 29.57,35.85 29.113,36.308 29.113,40.976 30.708,42.571 Q1_2.3
  Bottom Layer w2: Q1_2.3 31.518,42.547 42.35,42.547 42.35,39.893 D10.A ; 42.038,42.559 48.169,42.559 50.697,40.031 Q2_2.2
NetD12_A: D12.A D20.C J2.2 Q1_1.3 Q2_1.2 R2_1.2 R3_1.2 | length 124.7
  Top Layer w0.5: R3_1.2@28.488,58.347 28.488,58.147 29.22,57.415 31.339,57.415 Q1_1.3
  Top Layer w2: 52.4,61.55 59.23,54.72 62,54.72 ; D20.C 62,57.757 62,54.72 ; Q2_1.2 62,54.72
  Top Layer w3: 52.4,61.55 J2.2
  Bottom Layer w0.5: R2_1.2@29.738,49.447 29.57,49.615 29.57,50.54 29.113,50.997 29.113,55.665 30.708,57.26 Q1_1.3
  Bottom Layer w2: Q1_1.3 31.506,57.248 42.15,57.248 44.277,57.248 48.169,57.248 50.685,54.732 Q2_1.2@67.372,54.732 ; D12.A 42.708,54.494 43.105,54.89 43.105,56.128 44.277,57.3 48.117,57.3 50.697,54.72 Q2_1.2
NetD13_A: D13.A D21.C J2.1 Q1.3 Q2.2 R2.2 R3.2 | length 81.9
  Top Layer w0.5: R3.2@28.5,73.025 28.5,72.825 29.232,72.093 31.351,72.093 Q1.3
  Top Layer w2: 57.425,71.175 59.19,69.41 62.35,69.41 ; D21.C 62.35,69.41 ; 65.517,69.41 62.35,69.41 ; 65.755,69.41 Q2.2
  Top Layer w3: J2.1 57.4,83.65 57.407,83.643 57.407,76.623 ; 57.425,71.175 57.425,76.605
  Bottom Layer w0.5: R2.2@29.75,64.125 29.582,64.293 29.582,65.218 29.125,65.675 29.125,70.343 30.72,71.938 Q1.3
  Bottom Layer w2: Q1.3 31.518,71.926 42.05,71.926 ; D13.A 42.275,69.29 42.05,69.515 42.05,71.926 ; Q2.2 50.697,69.41 48.181,71.926 42.05,71.926
NetG1_1: G1.1 J1.4 | length 14.9
  Bottom Layer w0.7: J1.4 41.465,8.365 41.875,8.775 47.675,8.775 49.875,6.575 G1.1
NetJ1_5: J1.5 R10.2 | length 19.4
  Top Layer w0.5: R10.2@33.975,14.35 33.975,7.107 37.914,3.169 42.699,3.169 J1.5
NetR17_1: R17.1 R18.2 | length 2
  Top Layer w0.5: R17.1@74.575,40.2 R18.2@76.575,40.2
NetR17_2: R17.2 R21.2 U1.1 | length 11
  Top Layer w0.5: R17.2@74.575,42.2 73.025,42.2 72.3,41.475 72.3,38.625 73.05,37.875 74.5,37.875 74.55,37.925 74.75,37.925 76.4,36.275 76.48,36.275 76.525,36.23 U1.1
NetR18_1: R18.1 R19.2 | length 2
  Top Layer w0.5: R18.1@76.575,42.2 R19.2@78.575,42.2
NetR19_1: R19.1 R20.2 | length 2
  Top Layer w0.5: R19.1@78.575,40.2 R20.2@80.575,40.2
NetR20_1: R20.1 R22.2 U1.4 | length 8.4
  Top Layer w0.5: U1.4 79.745,38.43 80.175,38 80.375,38 81.6,38 81.925,38.325 81.925,41.05 80.775,42.2 R20.1@80.575,42.2
NetR25_1: R25.1 R26.2 | length 2
  Top Layer w0.5: R25.1@74.85,29.2 R26.2@76.85,29.2
NetR25_2: R25.2 R40.2 U2.1 | length 9.8
  Top Layer w0.5: R25.2@74.85,31.2 74.56,30.91 74.36,30.91 73.6,30.15 73.6,26.748 73.769,26.579 74.434,26.579 74.563,26.45 75.05,26.45 76.955,24.545 76.955,24.195 U2.1
NetR26_1: R26.1 R27.2 | length 2
  Top Layer w0.5: R26.1@76.85,31.2 R27.2@78.85,31.2
NetR27_1: R27.1 R28.2 | length 2
  Top Layer w0.5: R27.1@78.85,29.2 R28.2@80.85,29.2
NetR28_1: R28.1 R42.2 U2.4 | length 8.8
  Top Layer w0.5: U2.4 78.9,26.588 78.945,26.542 80.733,26.542 80.85,26.425 81.95,26.425 82.3,26.775 82.3,29.95 81.05,31.2 R28.1@80.85,31.2
sensI_1: J1.1 R40.1 | length 55.9
  Top Layer w0.5: R40.1 74.877,24.475 74.877,22.798 v1(74.95,22.725)
  Bottom Layer w0.5: J1.1 39.1,4.3 39.1,2.493 39.393,2.2 55.6,2.2 57.554,4.154 57.554,16.904 59.35,18.7 70.925,18.7 v1(74.95,22.725)
sensI_2: J1.3 R21.1 | length 61.4
  Top Layer w0.5: v1(73.925,33.5) 73.925,33.708 74.55,34.333 74.55,35.94 R21.1
  Bottom Layer w0.5: J1.3 42.986,2.954 54.804,2.954 56.8,4.95 56.8,17.525 58.925,19.65 69.5,19.65 73.925,24.075 v1(73.925,33.5)
Vpwr: C4.1 C5.1 D9.C D10.C D12.C D13.C J2.5 Q1.2 Q1_1.2 Q1_2.2 Q1_3.2 R10.1 | length 176.4
  Top Layer w0.5: R10.1@31.975,14.35 31.975,15.9 34.425,18.35 34.425,25.341
  Top Layer w2: C4.1 C5.1 24.625,83.075 37.407,83.075 ; Q1_3.2 34.425,25.341 36.316,25.341 36.318,25.343 ; Q1_2.2 37.326,40.031 37.407,39.95 ; Q1_1.2 36.962,54.72 37.407,54.275 ; Q1.2@32.03,69.41 36.03,69.41 36.04,69.4 37.407,69.4 ; 36.018,25.353 36.028,25.343 36.318,25.343 ; 37.375,26.4 36.318,25.343
  Top Layer w5: J2.5 37.407,86.918 37.407,83.075 37.407,69.4 37.407,54.275 37.407,39.95 37.407,26.432
  Bottom Layer w2: Q1_3.2 34.382,25.341 41.395,18.329 41.903,18.329 D9.C ; Q1_2.2@32.018,40.043 34.327,40.043 41.358,33.011 41.866,33.011 D10.C@42.263,32.614 ; Q1_1.2@32.018,54.72 34.13,54.72 41.096,47.754 41.803,47.754 D12.C ; Q1.2@32.03,69.41 34.339,69.41 41.37,62.379 41.878,62.379 D13.C ; D10.C@41.295,33.004 41.692,32.607 D10.C
pads on no net: J3.9 Q1. Q1_1. Q1_2. Q1_3. Q2. Q2_1. Q2_2. Q2_3.

## Polygon pours and split planes (outlines as drawn)
AGND on Bottom Layer "GND" (solid, remove dead copper, pour order 1): 0,91.65 90,91.65 90,0 0,0
AGND on Top Layer "GND" (solid, remove dead copper, pour order 0): 0,91.65 90,91.65 90,0 0,0

## Keep-outs
Keep-Out Layer:
  the board outline again, w0.2

## Silkscreen, mask and mechanical layers (free items; w line width, h text height)
Top Solder:
  lines w1.6: 31.494,25.341 37.425,25.4 37.4,86.925 ; 31.494,40.031 37.35,40.05 ; 31.494,54.72 37.35,54.775 ; 31.506,69.398 37.175,69.4 ; 42.4,86.925 42.4,41.425 42.675,41.15 58.425,25.35 67.384,25.341 ; 47.4,86.925 47.425,51.75 59.125,39.975 67.384,40.031 ; 52.4,86.925 52.4,61.7 59.35,54.775 67.384,54.72 ; 57.4,86.925 57.4,71.284 59.108,69.425 67.384,69.41
Bottom Solder:
  lines w1.6: 31.494,27.881 48.319,27.881 50.875,25.325 67.384,25.341 ; 31.494,42.571 48.225,42.525 50.75,40 67.384,40.031 ; 31.494,57.26 48.065,57.26 48.175,57.15 48.225,57.15 50.675,54.7 67.384,54.72 ; 31.506,71.938 48.175,71.95 50.715,69.41 67.384,69.41

## Text inside footprints (layer, text, board x,y; h text height)
1: Top Overlay "IR2104" at 19.723,70.831 h0.61
1_1: Top Overlay "IR2104" at 19.711,56.153 h0.61
1_2: Top Overlay "IR2104" at 19.711,41.464 h0.61
1_3: Top Overlay "IR2104" at 19.688,26.681 h0.61